# EAGLE board trans (EAGLE 6.1)
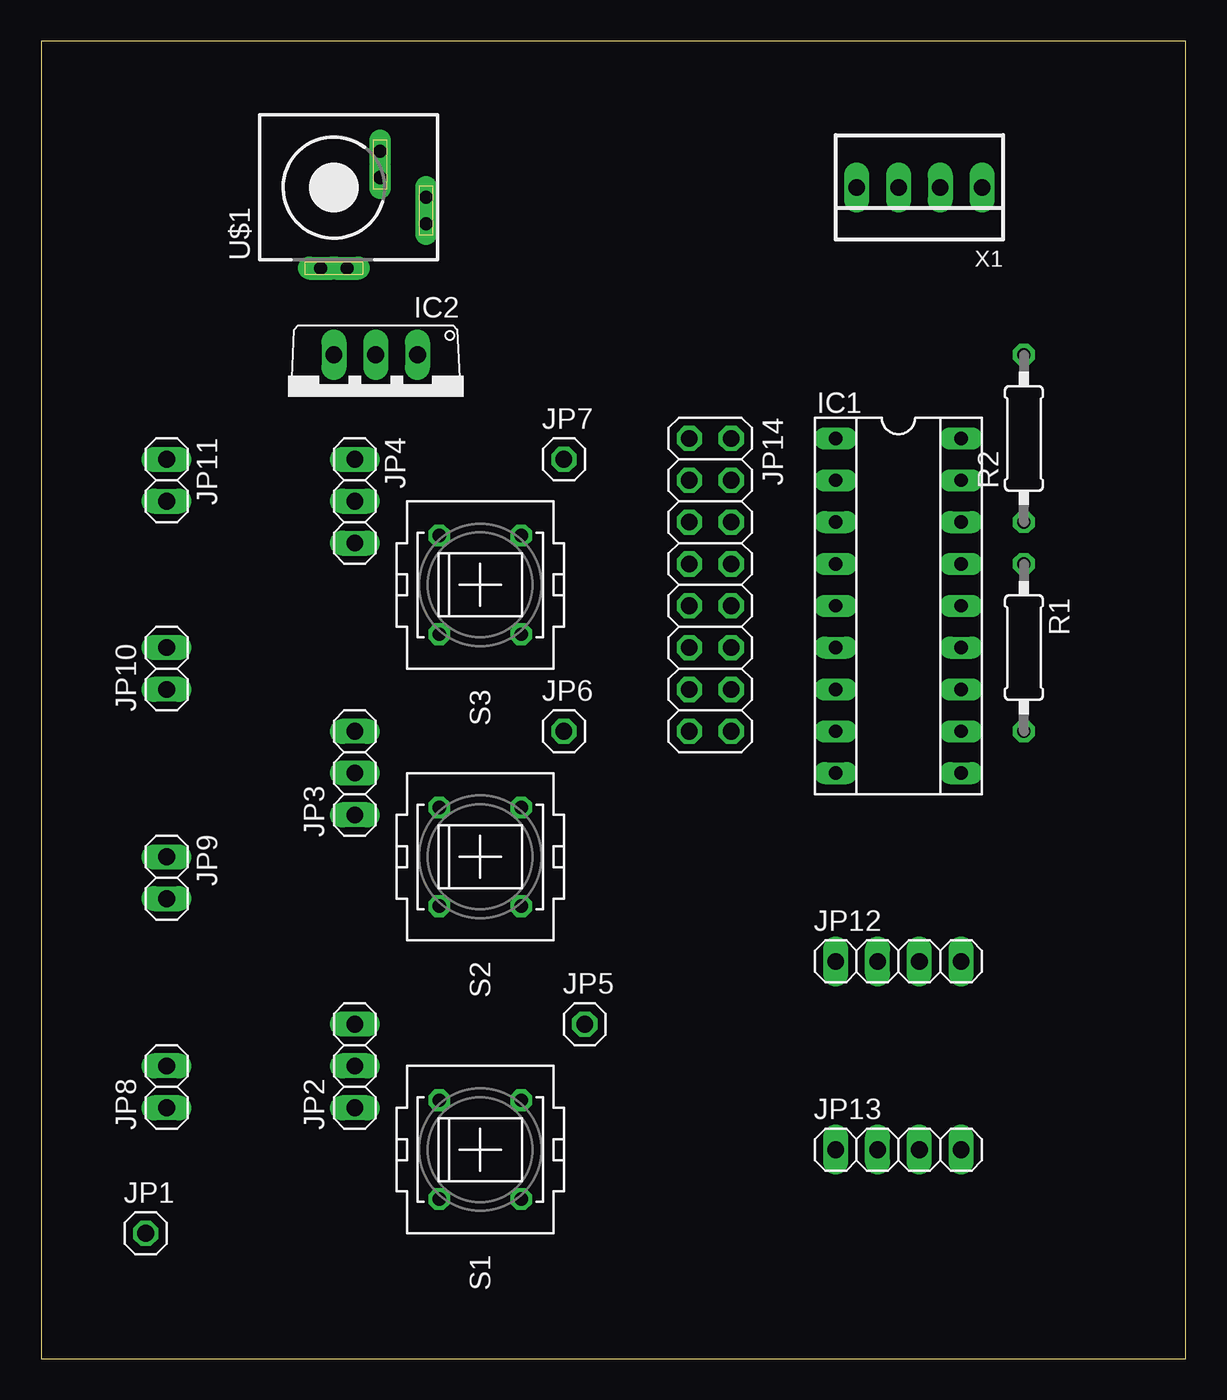
[diagram p0: board, top side]
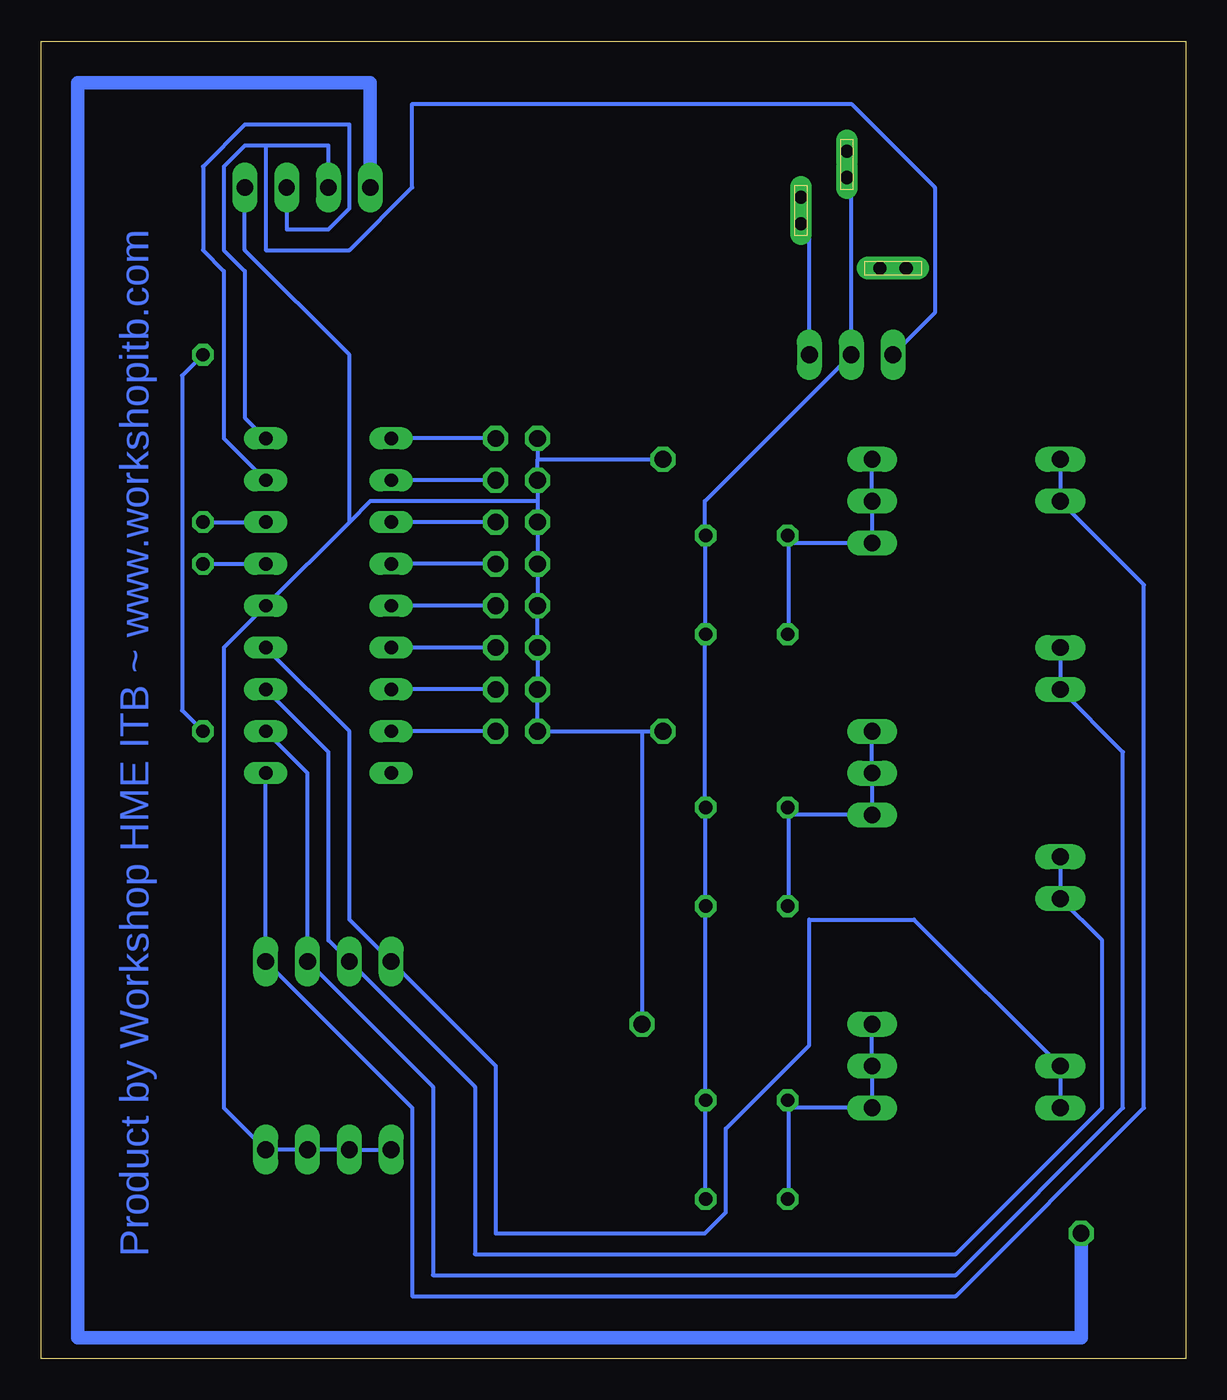
[diagram p1: board, bottom side, seen from below]

Size 69.52 x 80 mm. Coordinates in mm from the lower left corner, seen from the top.
Outline: 0,0 69.52,0 69.52,80 0,80 0,0
Copper layers (1*16): Top 0.035mm / dielectric 1.5mm / Bottom 0.035mm
Design rules: minimum track width 10mil, minimum drill 24mil, track to track 8mil, track to pad 8mil, pad to pad 8mil, via to via 8mil, smd to smd 8mil, copper to edge 40mil, drill to drill 8mil, minimum pad ring 10mil, minimum via ring 8mil, stop-mask expansion 4mil, vias tented up to drill 0mil, thermal gap 10mil

## Footprints (pad centres in the part's own frame; a part is rotated, then mirrored left to right if it is on the bottom)
SOCKET-18 = drill 0.813 long: 1 -10.16,-3.81; 2 -7.62,-3.81; 3 -5.08,-3.81; 4 -2.54,-3.81; 5 0,-3.81; 6 2.54,-3.81; 7 5.08,-3.81; 8 7.62,-3.81; 9 10.16,-3.81; 10 10.16,3.81; 11 7.62,3.81; 12 5.08,3.81; 13 2.54,3.81; 14 0,3.81; 15 -2.54,3.81; 16 -5.08,3.81; 17 -7.62,3.81; 18 -10.16,3.81
TO220V = drill 1.016 long: 1 -2.54,-2.54; 2 0,-2.54; 3 2.54,-2.54
1X01 = drill 1.016 octagon: 1 0,0
1X03 = drill 1.016 long: 1 -2.54,0; 2 0,0; 3 2.54,0
1X02 = drill 1.016 long: 1 -1.27,0; 2 1.27,0
1X04 = drill 1.016 long: 1 -3.81,0; 2 -1.27,0; 3 1.27,0; 4 3.81,0
2X08 = drill 1.016 octagon: 1 -8.89,-1.27; 2 -8.89,1.27; 3 -6.35,-1.27; 4 -6.35,1.27; 5 -3.81,-1.27; 6 -3.81,1.27; 7 -1.27,-1.27; 8 -1.27,1.27; 9 1.27,-1.27; 10 1.27,1.27; 11 3.81,-1.27; 12 3.81,1.27; 13 6.35,-1.27; 14 6.35,1.27; 15 8.89,-1.27; 16 8.89,1.27
0207/10 = drill 0.813 octagon: 1 -5.08,0; 2 5.08,0
PVA1R = drill 0.813 octagon: 1 -2.997,2.489; 2 -2.997,-2.489; 3 2.997,2.489; 4 2.997,-2.489
KLDVX-0202-C = drill 0.8 pad 1.4 long: 1 -4.9,0.8; 1@1 -4.9,-0.8 | drill 0.8 pad 1.3 long: 2 -2.2,-5.6; 2@1 -0.6,-5.6; 3 0.6,-2.8; 3@1 2.2,-2.8
22-23-2041 = drill 1 long: 1 -3.81,0; 2 -1.27,0; 3 1.27,0; 4 3.81,0

## Placement (x,y rotation side)
IC1  [SOCKET-18]  52.07,45.72 270 top
IC2  7805TV  [TO220V]  20.32,58.42 180 top
JP1  [1X01]  6.35,7.62 0 top
JP2  [1X03]  19.05,17.78 90 top
JP3  [1X03]  19.05,35.56 90 top
JP4  [1X03]  19.05,52.07 270 top
JP5  [1X01]  33.02,20.32 0 top
JP6  [1X01]  31.75,38.1 0 top
JP7  [1X01]  31.75,54.61 0 top
JP8  [1X02]  7.62,16.51 90 top
JP9  [1X02]  7.62,29.21 270 top
JP10  [1X02]  7.62,41.91 90 top
JP11  [1X02]  7.62,53.34 270 top
JP12  [1X04]  52.07,24.13 0 top
JP13  [1X04]  52.07,12.7 0 top
JP14  [2X08]  40.64,46.99 270 top
R1  [0207/10]  59.69,43.18 270 top
R2  [0207/10]  59.69,55.88 90 top
S1  PVA1R  [PVA1R]  26.67,12.7 270 top
S2  PVA1R  [PVA1R]  26.67,30.48 270 top
S3  PVA1R  [PVA1R]  26.67,46.99 270 top
U$1  KLDVX-0202-C  [KLDVX-0202-C]  17.78,71.12 90 top
X1  22-23-2041  [22-23-2041]  53.34,71.12 180 top

## Library data of the parts
IC1 = ic-package
IC2 = linear
JP1-JP14 = pinhead
R1 R2 = rcl
S1-S3 = switch-misc
U$1 = con-kycon; OC_FARNELL: unknown; OC_NEWARK: unknown
X1 = con-molex; MF: MOLEX; MPN: 22-23-2041; OC_FARNELL: 1462920; OC_NEWARK: 38C0355

## Nets
N$1: IC1.14 JP5.1 JP6.1 JP7.1 JP13.1 JP13.2 JP13.3 JP13.4 JP14.1 JP14.3 JP14.5 JP14.7 JP14.9 JP14.11 JP14.13 JP14.15 X1.1
N$2: IC1.10 JP11.1 JP11.2 JP12.4
N$3: IC1.11 JP10.1 JP10.2 JP12.3
N$4: IC1.12 JP9.1 JP9.2 JP12.2
N$5: IC1.13 JP8.1 JP8.2 JP12.1
N$6: JP2.1 JP2.2 JP2.3 S1.2 S1.4
N$7: IC2.1 U$1.2
N$8: JP3.1 JP3.2 JP3.3 S2.2 S2.4
N$9: IC1.15 R1.1
N$10: IC1.16 R2.1
N$11: R1.2 R2.2
N$12: JP4.1 JP4.2 JP4.3 S3.2 S3.4
N$13: IC1.17 X1.2
N$14: JP1.1 X1.4
N$15: IC2.2 S1.1 S1.3 S2.1 S2.3 S3.1 S3.3 U$1.3
N$17: IC1.1 JP14.2
N$18: IC1.2 JP14.4
N$19: IC1.3 JP14.6
N$20: IC1.4 JP14.8
N$21: IC1.5 JP14.10
N$22: IC1.6 JP14.12
N$23: IC1.7 JP14.14
N$24: IC1.8 JP14.16
VCC: IC1.18 IC2.3 X1.3

## Tracks (layer width: path | path; a pad name or v marks a point on that pad's centre or on a via)
N$1
  Bottom 0.254: 33.02,38.1 JP14.15 JP14.13 JP14.11 JP14.9 JP14.7 JP14.5 39.37,52.07 | 33.02,38.1 JP6.1 | 33.02,38.1 JP5.1 | 39.37,54.61 JP7.1 | JP14.1 39.37,54.61 | JP13.1 JP13.2 JP13.3 JP13.4 58.42,15.24 58.42,43.18 IC1.14 50.8,50.8 | 50.8,50.8 49.53,52.07 39.37,52.07 | 39.37,52.07 JP14.3 39.37,54.61 | X1.1 57.15,67.31 50.8,60.96 50.8,50.8
N$2
  Bottom 0.254: JP11.1 JP11.2 2.54,46.99 2.54,15.24 13.97,3.81 46.99,3.81 46.99,15.24 JP12.4 IC1.10
N$3
  Bottom 0.254: JP10.2 JP10.1 3.81,36.83 3.81,15.24 13.97,5.08 45.72,5.08 45.72,16.51 JP12.3 53.34,35.56 IC1.11
N$4
  Bottom 0.254: JP9.1 JP9.2 5.08,25.4 5.08,15.24 13.97,6.35 43.18,6.35 43.18,16.51 JP12.2 52.07,25.4 52.07,36.83 IC1.12
N$5
  Bottom 0.254: JP8.1 JP8.2 16.51,26.67 22.86,26.67 22.86,19.05 27.94,13.97 27.94,8.89 29.21,7.62 41.91,7.62 41.91,17.78 JP12.1 50.8,26.67 50.8,38.1 IC1.13
N$6
  Bottom 0.254: 24.13,15.24 24.13,10.16 S1.4 | JP2.3 JP2.2 JP2.1 24.13,15.24 | 24.13,15.24 S1.2
N$7
  Bottom 0.254: IC2.1 22.86,68.58 U$1.2
N$8
  Bottom 0.254: 24.13,33.02 24.13,27.94 S2.4 | JP3.3 JP3.2 JP3.1 24.13,33.02 | 24.13,33.02 S2.2
N$9
  Bottom 0.254: R1.1 IC1.15
N$10
  Bottom 0.254: R2.1 IC1.16
N$11
  Bottom 0.254: R1.2 60.96,39.37 60.96,59.69 R2.2
N$12
  Bottom 0.254: 24.13,49.53 24.13,44.45 S3.4 | JP4.1 JP4.2 JP4.3 24.13,49.53 | 24.13,49.53 S3.2
N$13
  Bottom 0.254: IC1.17 58.42,55.88 58.42,66.04 59.69,67.31 59.69,72.39 57.15,74.93 50.8,74.93 50.8,69.85 52.07,68.58 54.61,68.58 X1.2
N$14
  Bottom 0.813: JP1.1 6.35,1.27 67.31,1.27 67.31,77.47 49.53,77.47 X1.4
N$15
  Bottom 0.254: U$1.3 20.32,71.12 IC2.2 29.21,52.07 29.21,49.53 | 29.21,49.53 29.21,44.45 | 29.21,15.24 29.21,10.16 S1.3 | 29.21,33.02 29.21,27.94 | 29.21,27.94 29.21,15.24 | 29.21,15.24 S1.1 | 29.21,27.94 S2.3 | 29.21,33.02 29.21,44.45 | 29.21,44.45 S3.3 | 29.21,33.02 S2.1 | 29.21,49.53 S3.1
N$17
  Bottom 0.254: JP14.2 IC1.1
N$18
  Bottom 0.254: JP14.4 IC1.2
N$19
  Bottom 0.254: JP14.6 IC1.3
N$20
  Bottom 0.254: JP14.8 IC1.4
N$21
  Bottom 0.254: JP14.10 IC1.5
N$22
  Bottom 0.254: JP14.12 IC1.6
N$23
  Bottom 0.254: JP14.14 IC1.7
N$24
  Bottom 0.254: JP14.16 IC1.8
VCC
  Bottom 0.254: IC1.18 57.15,57.15 57.15,66.04 58.42,67.31 58.42,72.39 57.15,73.66 55.88,73.66 | 55.88,73.66 52.07,73.66 X1.3 | IC2.3 15.24,63.5 15.24,71.12 20.32,76.2 46.99,76.2 46.99,71.12 50.8,67.31 55.88,67.31 55.88,73.66

## Text on the board
Bottom: Product by Workshop HME ITB ~ www.workshopitb.com